# Altium PCB BSPD.PcbDoc (part 2 of 2)
Units mm, origin at the board's own origin, x right, y up, seen from the top; angles counter-clockwise.
Board outline 50 x 50 mm, 2 copper layers (Top Layer, Bottom Layer), stack 1.57 mm thick; 80 components, 29 nets, 173 pads, 66 vias.
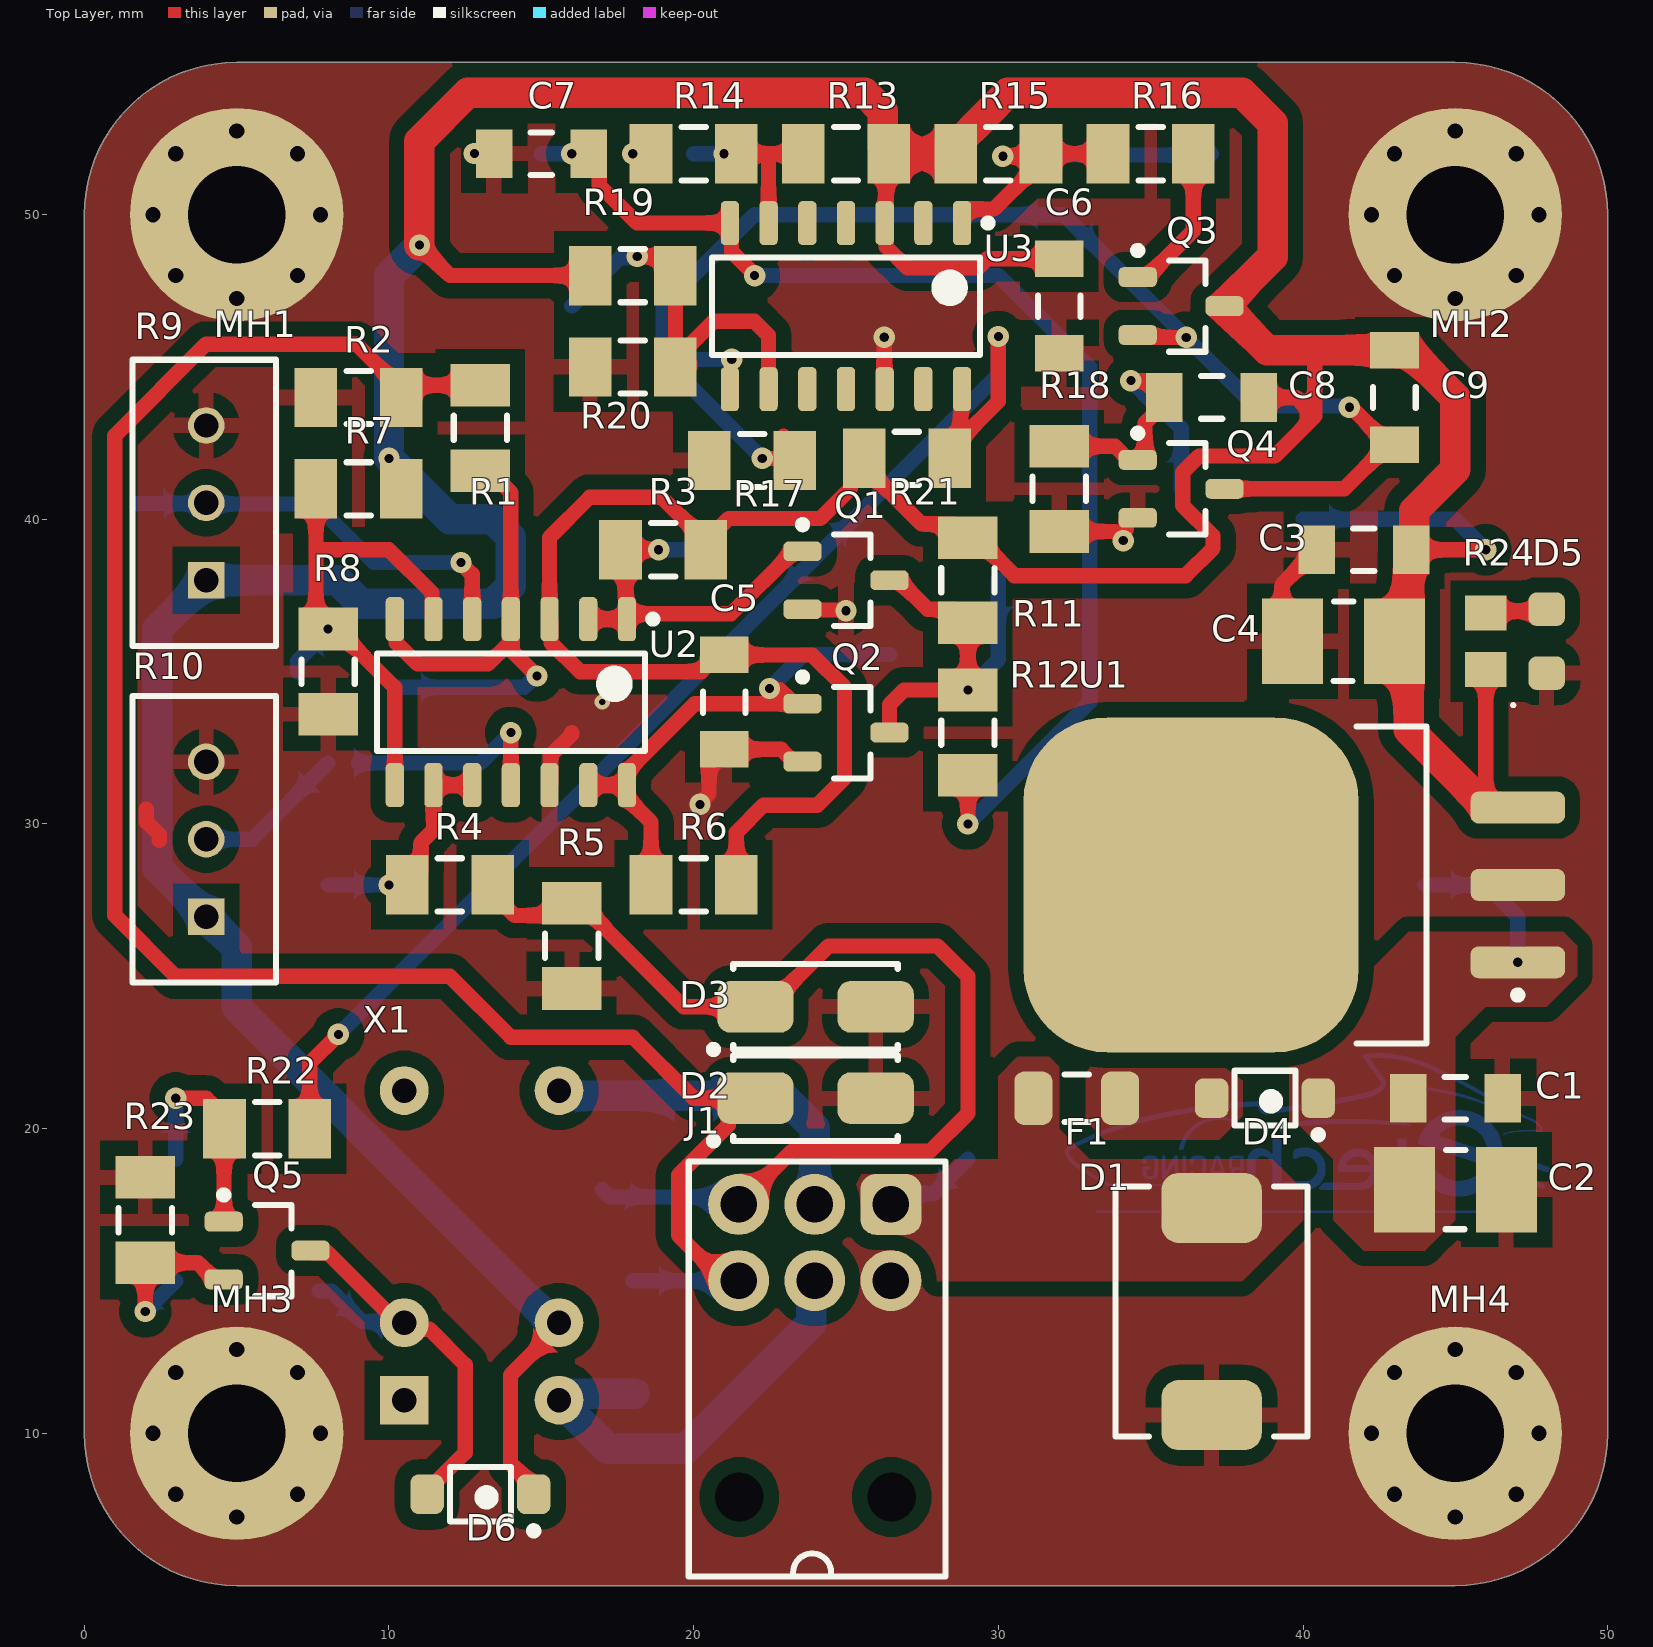
[diagram p0: Top Layer view]

## Via types
v1: diameter 0.7, hole 0.3, Top Layer to Bottom Layer, tented both sides, 33 vias
v2: diameter 0.7, hole 0.5, Top Layer to Bottom Layer, tented both sides, 32 vias
v3: diameter 0.5, hole 0.2, Top Layer to Bottom Layer, tented both sides, 1 vias

## Nets (pads, with @x,y where several pads share a name; then routed paths per layer and width w, separated by ;. In a path a pad name is that pad's centre, name@x,y a point inside that pad or via, vN(x,y) a via of type N, cw(c..) or ccw(c..) an arc to the next point about the centre after c; other vN are vias at no path point) (continued)
+12: (continued)
  Top Layer w0.5: v1(11,49) 12,48 R19.2 ; D6.K 14.465,8.285 14.465,8.535 13.99,9.01 13.99,11.91 X1.9@15.54,13.46 ; R3.1 R3.1@20.4,39.275 ; R6.1 21.4,29.725 22.292,30.617 24.058,30.617 24.95,31.51 24.95,34.49 23.89,35.55 C5.1 20.8,35.55 20.25,35 16.267,35 15.32,35.947 15.32,36.675 U2.3 15.27,39.406 16.589,40.725 18.95,40.725 R3.1@20.4,39.275 ; R13.2@26.32,52.08 26.32,49.775 U3.3 26.32,49.675 26.32,48.947 27.017,48.25 29.333,48.25 29.633,48.55 C6.2 ; C8.1 39.778,44 40.389,43.389 ; C9.2 42.839,45.389 40.389,45.389 40.389,43.389 ; C3.2@43.45,38.9 C3.2 v1(46,39) ; U1.3@46,30.814 R24.2 ; R3.1@20.4,39.275 21.15,40.025 24.161,40.025 25.15,41.014 25.15,41.55 R21.1 25.6,41.725 27.475,39.85 28.55,39.85 R11.1 29.275,39.4 30.525,38.15 36.15,38.15 37.048,39.048 37.048,39.462 36.05,40.46 36.05,41.54 36.585,42.075 39.075,42.075 40.389,43.389
  Top Layer w1: v1(11,49) 11,52.414 12.586,54 25.614,54 26.2,53.414 R13.2@26.2,52.2 ; R13.2 R15.1 28.6,52.275 29.579,53.254 29.579,53.268 30.311,54 38,54 39,53 39,48.625 37.425,47.05 Q3.D 37.425,46.95 38.825,45.55 C9.2@42.45,45.55 ; C9.2 43.1,45.45 43.55,45.45 45,44 45,41.636 43.65,40.286 43.65,39.1 C3.2 ; C3.2@43.45,38.9 43.45,36.45 C4.2 43.465,35.535 43.465,33.1 U1.3@46.025,30.54
  Bottom Layer w0.5: TP8.1 45,40 v1(46,39)
  Bottom Layer w1: v1(11,49) 10,48 v1(10,42) 12,40 13.414,40 14,39.414 14,37.817 13.414,37.231 9.081,37.231 8.312,38 R9.1 2.4,36.4 2.4,28.56 R10.1 5,25.96 5,23.994 15.534,13.46 X1.9@15.54,13.46
Brake_in: D3.2 J1.3 R4.1 R5.2 TP3.1 | length 36.9
  Top Layer w0.5: R4.1 13.4,27.725 14.125,27 15.6,27 R5.2 16.275,27.4 19.675,24 D3.2 22.425,24 24.425,26 28,26 29,25 29,20.5 27.765,19.265 25.043,19.265 23.225,19.265 J1.3
  Bottom Layer w0.5: TP3.1 17.243,17.757 21.232,17.757 J1.3
Brake_trig_lvl: R10.3 TP11.1 U2.11 | length 12.2
  Top Layer w0.5: U2.11 v1(14,33)
  Bottom Layer w0.5: R10.3 5.5,29.5 TP11.1 ; 9,32 13,32 v1(14,33)
Brake_trigger: Q2.G R6.2 TP15.1 U2.13 U2.14 | length 17.4
  Top Layer w0.5: U2.13 U2.14 ; R6.2 18.6,30.06 17.81,30.85 U2.14 ; v1(22.487,34.45) 22.526,34.412 22.813,34.412 Q2.G@23.275,33.95 ; Q2.G Q2.G@23.275,33.95 ; U2.14 17.86,31.325 17.86,31.771 20.039,33.95 Q2.G@23.275,33.95
  Bottom Layer w0.5: v1(22.487,34.45) 23.6,35.562 TP15.1
GND: C1.1 C2.1 C3.1 C4.1 C5.2 C6.1 C7.1 D1.1 D2.1 D3.1 D5.K J1.4 MH1.1 MH2.1 MH3.1 MH4.1 Q1.S Q2.S Q4.S R2.1 R5.1 R8.1 R9.2 R10.2 R14.1 R17.1 R18.1 R20.1 R23.2 TP2.1 U1.2 U2.12 U3.12 | length 19.3
  Top Layer w0.5: 2.035,30.485 2.035,30.074 2.46,29.649 2.46,29.46 ; v1(12.802,52.009) 12.811,52 C7.1 ; U2.12 15.32,31.325 15.32,32.266 16,32.946 16,33 ; v1(18,52) R14.1 ; v1(20.207,30.646) 20.207,30.7 20.5,30.992 20.5,32.1 20.85,32.45 C5.2 22.875,32.45 23.275,32.05 Q2.S ; Q1.S 23.6,37.025 24.975,37.025 v1(25,37) ; v1(26.257,45.978) 26.257,44.288 U3.12 ; R18.1 33.825,39.6 ; v1(34.1,39.302) 34.138,39.34 34.138,39.613 34.2,39.675 34.2,39.975 34.275,40.05 Q4.S ; C4.1 39.307,36.343 39.307,37.857 39.9,38.45 40.1,38.45 40.45,38.8 C3.1
  other v2: 5,7.25 45,7.25 3,8 7,8 43,8 47,8 2.25,10 7.75,10 42.25,10 47.75,10 3,12 7,12 43,12 47,12 5,12.75 45,12.75 5,47.25 45,47.25 3,48 7,48 43,48 47,48 2.25,50 7.75,50 42.25,50 47.75,50 3,52 7,52 43,52 47,52 5,52.75 45,52.75
  other v3: 17,34
Hall_in: D2.2 J1.6 R1.1 R2.2 TP4.1 | length 65.2
  Top Layer w0.5: R1.1 10.8,44.4 R2.2 10.4,44.275 8.925,45.75 4,45.75 1,42.75 1,27 3,25 12,25 14,23 18,23 20,21 D2.2@21.72,21 ; J1.6@21.475,14.605 21.395,14.605 19.5,16.5 19.5,18.475 21.133,20.108 21.133,20.413 D2.2@21.72,21 ; D2.2 D2.2@21.72,21
  Bottom Layer w0.5: TP4.1 18.007,15.007 21.468,15.007 J1.6
Hall_trig_lvl: R9.3 TP10.1 U2.5 | length 13.5
  Top Layer w0.5: v1(12.365,38.581) 12.365,38.561 12.73,38.196 U2.5
  Bottom Layer w0.5: TP10.1 1.77,40.52 3.98,40.52 R9.3 4.04,40.5 7.58,40.5 9.499,38.581 v1(12.365,38.581)
Hall_trigger: Q1.G R3.2 TP14.1 U2.1 U2.2 | length 12.7
  Top Layer w0.5: U2.2 U2.1 17.76,36.775 17.76,38.84 R3.2 v1(18.85,39) ; U2.1@17.81,36.85 17.86,36.9 21.225,36.9 23.275,38.95 Q1.G
  Bottom Layer w0.5: v1(18.85,39) TP14.1
Halt: R15.2 R16.1 TP20.1 U3.1 | length 14.3
  Top Layer w0.5: U3.1 28.81,50.135 28.86,50.185 29.86,50.185 31.4,51.725 R15.2 ; v1(30.15,51.916) 31.316,51.916 R15.2 ; R16.1 R15.2
  Bottom Layer w0.5: v1(30.15,51.916) 30.188,51.954 36.954,51.954 TP20.1
Implausability: C7.2 R12.2 TP18.1 U3.7 | length 39.5
  Top Layer w0.5: C7.2 16.9,51.65 16.9,50.964 18.139,49.725 U3.7 21.24,49.675 21.24,48.796 22,48.036 v1(22,48) ; v1(29,30) R12.2
  Bottom Layer w0.5: TP18.1 v1(16,52) ; v1(22,48) 30,48 33,45 33,34 v1(29,30)
LV+_in: D1.2 F1.1 J1.1 TP1.1 | length 3.1
  Bottom Layer w0.5: J1.1 26.825,17.865 27.865,17.865 TP1.1
NetC1_2: C1.2 C2.2 D4.K TP7.1 U1.1 | length 5
  Bottom Layer w0.5: TP7.1 46,28 47.05,26.95 v1(47.05,25.46)
NetC8_2: C8.2 Q4.G R18.2 TP27.1 | length 11.1
  Top Layer w0.5: R18.2 33.825,42.4 34.275,41.95 34.875,41.95 34.817,42.008 34.817,43.167 35.45,43.8 35.45,44.2 35.1,44.55 34.352,44.55 v1(34.35,44.552)
  Bottom Layer w0.5: v1(34.35,44.552) 35.145,43.757 35.243,43.757 36,43 TP27.1
NetD4_A: D4.A F1.2
NetD5_A: D5.A R24.1 | length 2.1
  Top Layer w0.5: R24.1 46.062,36.987 47.937,36.987 D5.A
NetD6_A: D6.A Q5.D TP26.1 X1.2 | length 14.7
  Top Layer w0.5: Q5.D 7.5,15.925 7.995,15.925 X1.2@10.46,13.46 ; X1.2 10.71,13.42 11.33,13.42 12.5,12.25 12.5,9.364 11.25,8.114 D6.A
  Bottom Layer w0.5: TP26.1 8.116,14.671 9.117,13.67 10.25,13.67 X1.2@10.46,13.46
NetQ1_D: Q1.D Q2.D R11.2 R12.1 TP17.1 | length 13.1
  Top Layer w0.5: Q2.D 26.425,33.925 26.9,34.4 v1(29,34.4) R11.2 28.55,37.05 27.675,37.05 26.725,38 Q1.D
  Bottom Layer w0.5: v1(29,34.4) 30,35.4 TP17.1
NetQ3_G: Q3.G R16.2 | length 5
  Top Layer w0.5: Q3.G 34.875,47.95 36.4,49.475 R16.2
NetQ5_G: Q5.G R22.2 TP24.1 | length 7.3
  Top Layer w0.5: v1(3,21) 4,21 4.15,20.85 4.15,20.425 4.588,19.988 4.588,16.963 Q5.G
  Bottom Layer w0.5: TP24.1 v1(3,21)
NetQ5_S: Q5.S R23.1 TP25.1 | length 5.8
  Top Layer w0.5: v1(2,14) R23.1 3.725,15.6 4.275,15.05 Q5.S
  Bottom Layer w0.5: v1(2,14) TP25.1
NetR1_2: R1.2 TP12.1 U2.4 U2.7 | length 18.4
  Top Layer w0.5: U2.7 10.24,36.675 10.24,35.947 10.937,35.25 13.253,35.25 13.95,35.947 13.95,36.675 U2.4 ; R1.2 13.275,41.6 14,40.875 U2.4 ; v1(14.856,34.856) 14.05,35.662 14.05,36.675 U2.4
  Bottom Layer w0.5: TP12.1 14.431,34.485 14.802,34.856 v1(14.856,34.856)
NetR4_2: R4.2 TP13.1 U2.9 U2.10 | length 6.9
  Top Layer w0.5: R4.2 11.05,28.45 11.05,29.39 11.46,29.8 U2.9 U2.10
  Bottom Layer w0.5: TP13.1 v1(10,28)
NetR13_1: R13.1 R14.2 TP19.1 U3.6 | length 5.5
  Top Layer w0.5: R14.2 22.5,52 ; U3.6 22.46,51.96 22.5,52 ; R13.1 22.5,52
  Bottom Layer w0.5: TP19.1 v1(21,52)
NetR19_1: R19.1 R20.2 TP22.1 U3.9 | length 12.8
  Top Layer w0.5: v1(18.15,48.625) 18.95,48.625 19.4,48.175 R19.1 R20.2@19.4,45.275 ; R20.2@19.4,45.25 R20.2@19.4,45.275 ; R20.2@19.869,45.003 R20.2@19.869,45.119 ; U3.9 22.46,46.04 22,46.5 20.65,46.5 19.875,45.725 19.85,45.725 R20.2@19.4,45.275
  Bottom Layer w0.5: TP22.1 17.587,48.587 18.112,48.587 v1(18.15,48.625)
Reset: C9.1 Q3.S Q4.D R17.2 TP21.1 U3.8 | length 46.8
  Top Layer w0.5: U3.8 21.24,44.225 U3.8@21.24,43.8 ; v1(22.25,42) 23.4,42 23.4,42.275 R17.2@22.95,42.725 ; Q3.S 34.65,45.975 35.1,45.975 35.103,45.972 v1(36.168,45.972) ; Q4.D 41.35,41 42.8,42.45 41.57,43.68 v1(41.522,43.68)
  Bottom Layer w0.5: v1(21.25,45.25) 19.5,45.25 19.25,45 ; v1(22.25,42) 19.25,45 ; v1@41.522,43.718 38.422,43.718 v1(36.168,45.972) TP21.1 22,50 19,47 19,45.25 19.25,45
SC_close: R21.2 R22.1 TP23.1 U3.14 | length 41.7
  Top Layer w0.5: R22.1 7.4,22.157 v1(8.338,23.094) ; R21.2 28.4,42.275 R21.2@28.76,42.635 ; U3.14 28.76,44.225 R21.2@28.76,42.635 ; v1(30,46) 30,43.875 R21.2@28.76,42.635
  Bottom Layer w0.5: v1(8.338,23.094) 30,44.757 v1(30,46)
SC_in: J1.2 TP5.1 X1.6 | length 11.4
  Bottom Layer w1: X1.6@15.54,21.08 22.92,21.08 23.975,20.025 J1.2
SC_out: J1.5 TP6.3 X1.10 | length 14.9
  Bottom Layer w0.5: X1.10 X1.10@15.785,11.295 ; TP6.3@18.045,11.295 TP6.3
  Bottom Layer w1: X1.10 17.17,9.5 19.75,9.5 23.852,13.602 23.852,14.892 J1.5 ; X1.10@15.785,11.295 TP6.3@18.045,11.295
SCS_ref_lvl: R7.2 R8.2 TP9.1 U2.6 U2.8 | length 18.2
  Top Layer w0.5: R7.2@7.6,40.585 R7.2@7.74,40.585 ; R7.2 7.6,39 ; U2.8 10.19,34.485 8.275,36.4 v1(8,36.4) 7.6,36.8 7.6,39 ; U2.6 11.41,36.775 11.41,37.59 10,39 7.6,39
  Bottom Layer w0.5: TP9.1 7,35.346 8,36.346 v1(8,36.4)
pads on no net: J1. U1.4 U3.2 U3.4 U3.5 U3.10 U3.11 U3.13 X1.1 X1.5

## Polygon pours and split planes (outlines as drawn)
GND on Top Layer "GND_L01_P004" (solid, remove dead copper, pour order 4): 5,5 cw(c5,10) 0,10 0,50 cw(c5,50) 5,55 45,55 cw(c45,50) 50,50 50,10 cw(c45,10) 45,5
LV+_in on Top Layer "LV+_IN_L01_P003" (solid, pour order 3): 25.167,17.833 28,15 38,15 40,17 40,18 39,19 33,19 32,20 32,22.029 31.675,22.354 30.625,22.354 30,21.729 30,19 25.75,19
NetC1_2 on Top Layer "NETC1_2_L01_P001" (solid, pour order 1): 39.548,20.234 39.766,20.234 41,19 41,17 42,16 44,16 45,17 45,23 46,24 48,24 49,25 49,26.002 48.537,26.465 43.465,26.465 39.548,22.548
NetD4_A on Top Layer "NETD4_A_L01_P002" (solid, pour order 2): 37.244,22.157 38.03,21.577 38.03,20.423 37.244,19.637 33.485,19.637 32.868,20.253 32.868,21.79 33.098,22.157
GND on Bottom Layer "GND_L02_P000" (solid, remove dead copper, pour order 0): 5,5 cw(c5,10) 0,10 0,50 cw(c5,50) 5,55 45,55 cw(c45,50) 50,50 50,10 cw(c45,10) 45,5

## Other copper
Bottom Layer:
  drawing of 15 lines, arcs and shapes, not listed

## Silkscreen, mask and mechanical layers (free items; w line width, h text height)
Bottom Overlay:
  text "BSPD" at 39.503,25.752 h15
  text "David Redondo - 2022" at 33.497,24.5 h3
Mechanical 1:
  the board outline again, w0.5